# EAGLE board MainModule (EAGLE 9.6.2)
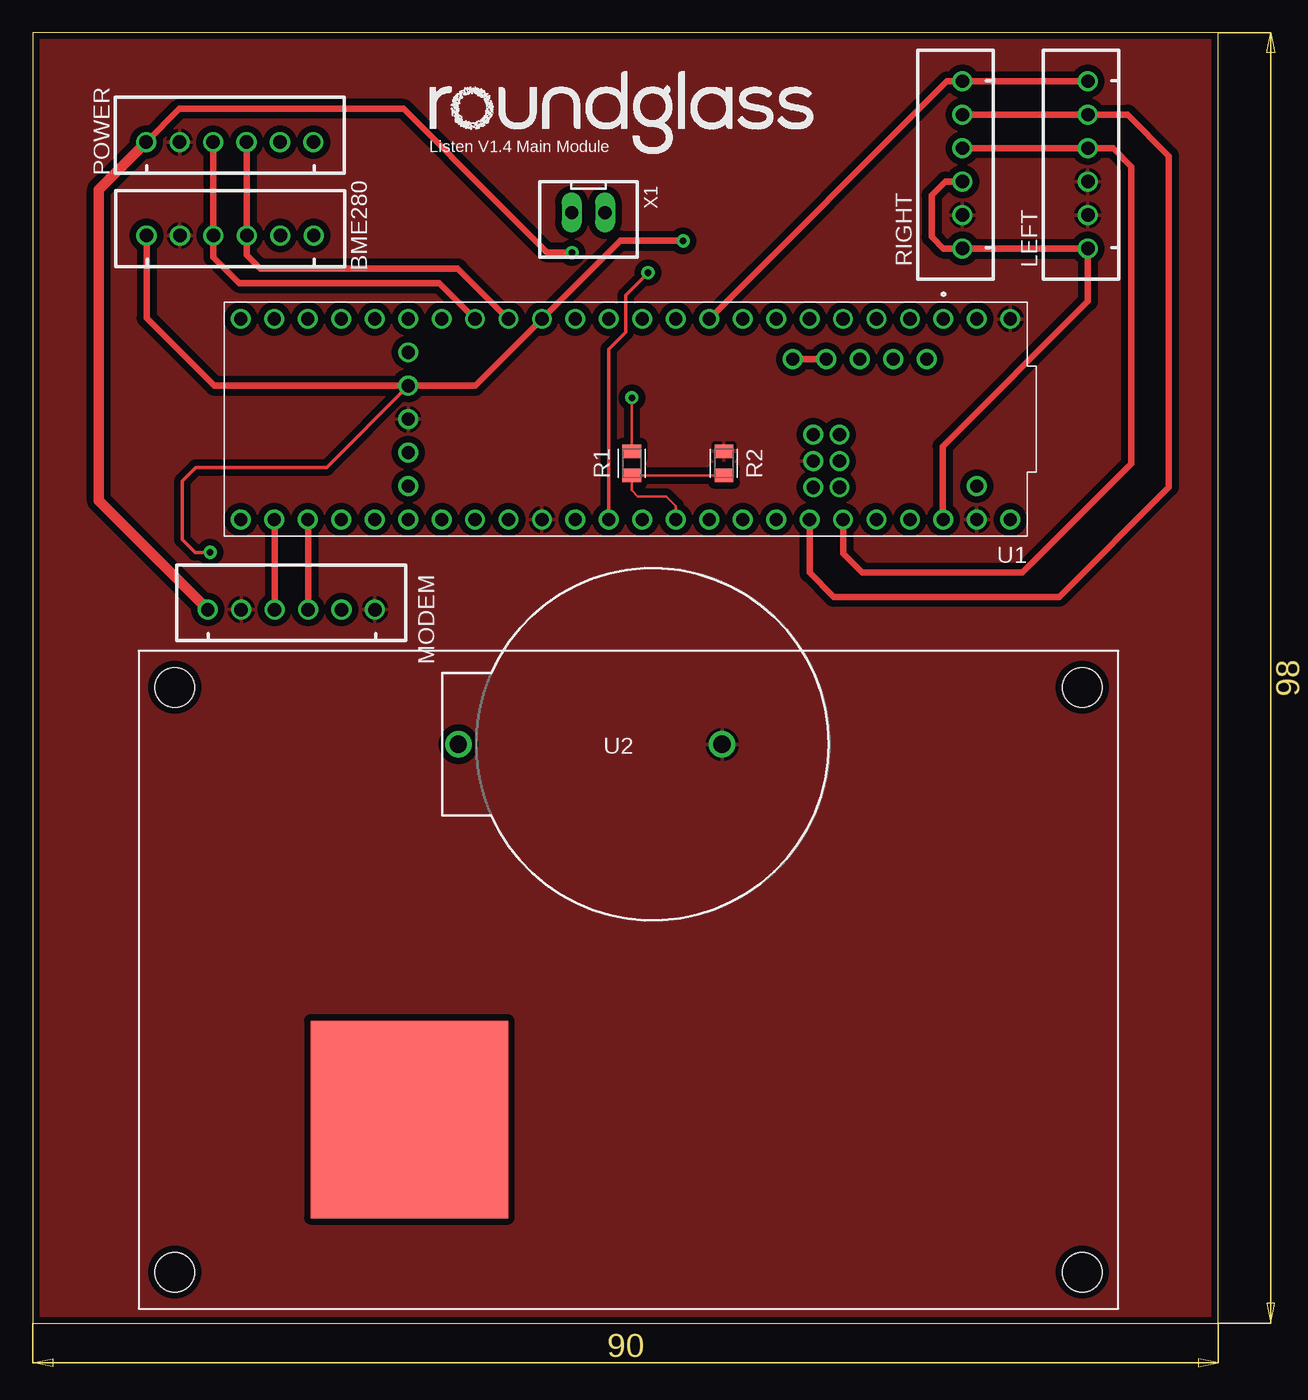
[diagram p0: board, top side]
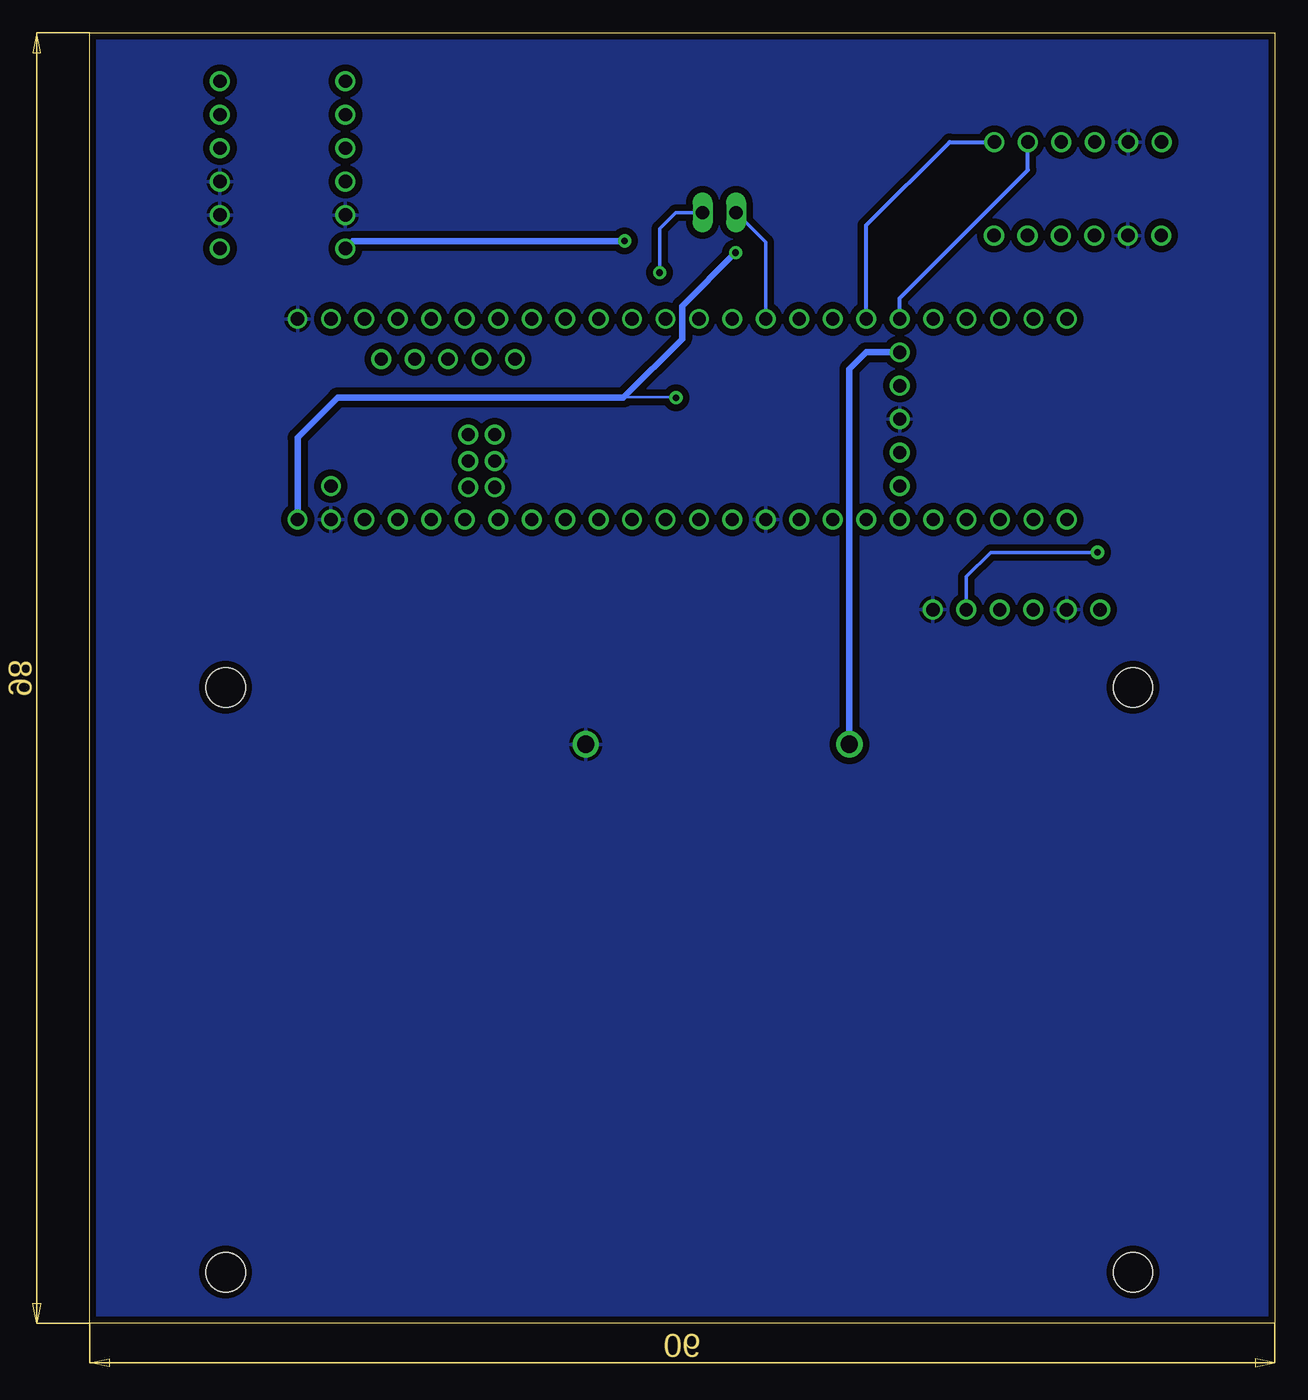
[diagram p1: board, bottom side, seen from below]

Size 90 x 98 mm. Coordinates in mm from the lower left corner, seen from the top.
Outline: 0,0 90,0 90,98 0,98 0,0
Copper layers (1*16): Top 0.035mm / dielectric 1.5mm / Bottom 0.035mm
Design rules "jotElectronics *": minimum track width 6mil, minimum drill 0.5mm, track to track 0.5mm, track to pad 0.5mm, pad to pad 0.5mil, via to via 0.5mm, smd to smd 0.25mm, copper to edge 0.5mm, drill to drill 0.5mm, minimum pad ring 10mil, minimum via ring 10mil, stop-mask expansion 4mil, vias tented up to drill 0mil, thermal gap 10mil

## Footprints (pad centres in the part's own frame; a part is rotated, then mirrored left to right if it is on the bottom)
JST-XH-06-PACKAGE-ROUND-PAD = drill 1.016: 1 -6.35,0; 2 -3.81,0; 3 -1.27,0; 4 1.27,0; 5 3.81,0; 6 6.35,0
RESC2012X65 = smd 1.031 x 1.42: 1 -0.919,0; 2 0.919,0
MODULE_DEV-16771 = drill 1: 0 -26.67,-7.62; 1 -24.13,-7.62; 2 -21.59,-7.62; 3 -19.05,-7.62; 3.3V_1 6.35,-7.62; 3.3V_2 -24.13,7.62; 3.3V_3 16.51,-2.54; 4 -16.51,-7.62; 5 -13.97,-7.62; 5V -22.86,-4.57; 6 -11.43,-7.62; 7 -8.89,-7.62; 8 -6.35,-7.62; 9 -3.81,-7.62; 10 -1.27,-7.62; 11 1.27,-7.62; 12 3.81,-7.62; 13 3.81,7.62; 14 1.27,7.62; 15 -1.27,7.62; 16 -3.81,7.62; 17 -6.35,7.62; 18 -8.89,7.62; 19 -11.43,7.62; 20 -13.97,7.62; 21 -16.51,7.62; 22 -19.05,7.62; 23 -21.59,7.62; 24 8.89,-7.62; 25 11.43,-7.62; 26 13.97,-7.62; 27 16.51,-7.62; 28 19.05,-7.62; 29 21.59,-7.62; 30 24.13,-7.62; 31 26.67,-7.62; 32 29.21,-7.62; 33 29.21,7.62; 34 26.67,7.62; 35 24.13,7.62; 36 21.59,7.62; 37 19.05,7.62; 38 16.51,7.62; 39 13.97,7.62; 40 11.43,7.62; 41 8.89,7.62; D+ -17.78,-4.57; D- -20.32,-4.57; GND1 -29.21,-7.62; GND2 6.35,7.62; GND3 -26.67,7.62; GND4 16.51,0; GND5 -14.24,3.17; LED -16.24,3.17; ON/OFF 16.51,5.08; PROGRAM 16.51,2.54; R+ -16.24,5.17; R- -14.24,5.17; T+ -14.24,1.17; T- -16.24,1.17; USB_GND1 -15.24,-4.57; USB_GND2 -12.7,-4.57; VBAT 16.51,-5.08; VIN -29.21,7.62; VUSB -26.67,5.08
1053 = drill 1.3 pad 2: 1 -5.265,0; 2 14.755,0
4GMODULE = hole 3: 2.74,2.77; 71.64,2.77; 71.64,47.19; 2.74,47.19
GPSANTENA = smd 15 x 15: P$1 7.59,7.47
JST-XH-02-PACKAGE-LONG-PAD = drill 1.016 long: 1 -1.27,0; 2 1.27,0

## Placement (x,y rotation side)
BME280  [JST-XH-06-PACKAGE-ROUND-PAD]  14.97,82.61 0 top
LEFT  [JST-XH-06-PACKAGE-ROUND-PAD]  80.1,87.98 90 top
MODEM  [JST-XH-06-PACKAGE-ROUND-PAD]  19.62,54.2 0 top
POWER  [JST-XH-06-PACKAGE-ROUND-PAD]  14.95,89.71 0 top
R1  22k  [RESC2012X65]  45.47,65.3 90 top
R2  22k  [RESC2012X65]  52.47,65.3 270 top
RIGHT  [JST-XH-06-PACKAGE-ROUND-PAD]  70.57,87.98 90 top
U1  DEV-16771  [MODULE_DEV-16771]  45,68.66 180 top
U2  1053  [1053]  47.06,43.97 180 top
U$1  4GMODULE4GMODULE  [4GMODULE]  8.03,1.1 0 top
U$2  GPSANTENA  [GPSANTENA]  21,8 0 top
X1  SOIL  [JST-XH-02-PACKAGE-LONG-PAD]  42.18,84.35 180 top

## Library data of the parts
BME280 LEFT MODEM POWER RIGHT = pinhead
R1 R2 = Resistor; CATEGORY: Resistor; SUB-CATEGORY: Fixed
U1 = DEV-16771; AVAILABILITY: In Stock; DESCRIPTION: RT1062 Teensy 4.1 series ARM® Cortex®-M7 MPU Embedded Evaluation Board; MF: SparkFun Electronics; MP: DEV-16771; PACKAGE: None; PRICE: None; PURCHASE-URL: https://pricing.snapeda.com/search/part/DEV-16771/?ref=eda; SPICEPREFIX: X
U2 = SamacSys_Parts; DESCRIPTION: Coin Cell Battery Holders BATTERY HOLDER FOR CR2450; HEIGHT: mm; MANUFACTURER_NAME: Keystone Electronics; MANUFACTURER_PART_NUMBER: 1053; MOUSER_PART_NUMBER: 534-1053-BH; MOUSER_PRICE-STOCK: https://www.mouser.co.uk/ProductDetail/Keystone-Electronics/1053?qs=%2F7TOpeL5Mz4zfgvqwo9sng%3D%3D
U$1 = 4Gmodule
U$2 = GPS_Antena
X1 = Rembrandt Electronics - JST XH Connectors v1-0

## Nets
3.3V: BME280.1 LEFT.1 MODEM.5 RIGHT.1 RIGHT.3 U1.3.3V_1 U1.3.3V_2 U1.3.3V_3 X1.2
5V: U1.5V
CONFIG: POWER.5 U1.27
GND: BME280.2 LEFT.2 LEFT.3 MODEM.2 MODEM.6 POWER.2 R2.1 RIGHT.2 U1.GND1 U1.GND2 U1.GND3 U1.GND4 U1.GND5 U2.1
N$2: R1.1 R2.2 U1.16
ON/OFF: U1.33
PKEY: U1.36
RECORDING: POWER.6 U1.26
RX: MODEM.3 U1.34
SCK: LEFT.4 RIGHT.4 U1.21
SCL: BME280.4 POWER.4 U1.24
SD: LEFT.6 RIGHT.6 U1.8
SDA: BME280.3 POWER.3 U1.25
SOIL: U1.14 X1.1
STS: U1.37
TX: MODEM.4 U1.35
USB_GND: U1.USB_GND1 U1.USB_GND2
VBAT: U1.VBAT U2.2
VIN: MODEM.1 POWER.1 R1.2 U1.VIN
WS: LEFT.5 RIGHT.5 U1.20

## Tracks (layer width: path | path; a pad name or v marks a point on that pad's centre or on a via)
3.3V  (via drill 0.5)
  Top 0.254: U1.3.3V_3 22.29,65 12.38,65 11.35,63.97 11.35,59.53 12.34,58.54 v13.46,58.54
  Top 0.5: BME280.1 8.62,76.34 13.77,71.2 | 33.57,71.2 U1.3.3V_1 | U1.3.3V_2 69.07,61.1 69.07,66.59 80.1,77.62 LEFT.1 RIGHT.1 69.12,81.63 68.24,82.51 68.24,85.66 69.28,86.71 RIGHT.3 | 49.35,82.22 v49.37,82.2
  Top 0.508: U1.3.3V_1 44.6,82.22 49.35,82.22 | 13.77,71.2 U1.3.3V_3 33.57,71.2
  Bottom 0.254: U1.3.3V_1 38.65,82.09 X1.2 | v13.46,58.54 21.58,58.54 23.43,56.69 MODEM.5
  Bottom 0.5: v49.37,82.2 70,82.2 RIGHT.1
CONFIG
  Bottom 0.305: U1.27 28.49,77.85 18.76,87.58 POWER.5
GND
  pour Top (isolate 0.305): 0,0 90,0 90,98 0,98
  pour Bottom: 0,0 90,0 90,98 0,98
N$2
  Top 0.203: U1.16 48.81,62.07 48.08,62.8 45.93,62.8 45.47,63.26 45.47,64.3 | 45.47,64.3 R1.1 R2.2 45.55,64.38 45.47,64.3
RECORDING
  Bottom 0.305: U1.26 31.03,83.38 24.7,89.71 POWER.6
RX
  Top 0.5: U1.34 18.35,61.02 MODEM.3
SCK
  Top 0.5: U1.21 61.51,58.45 62.96,57 75.12,57 83.41,65.29 83.41,87.86 82.02,89.25 LEFT.4 RIGHT.4
SCL
  Top 0.5: POWER.4 16.22,82.64 BME280.4 16.25,81.12 17.27,80.1 32.27,80.1 36.09,76.28 U1.24
SD
  Top 0.5: LEFT.6 RIGHT.6 69.4,94.33 U1.8
SDA
  Top 0.5: POWER.3 13.68,82.64 BME280.3 13.71,80.97 15.67,79 30.85,79 U1.25
SOIL  (via drill 0.5)
  Top 0.254: U1.14 43.73,74 45,75.27 45,78.08 v46.71,79.79
  Bottom 0.254: v46.71,79.79 46.71,83.15 45.51,84.35 X1.1
TX
  Top 0.5: U1.35 20.89,61.02 MODEM.4
USB_GND
  Top 0.5: U1.USB_GND2 U1.USB_GND1
VBAT
  Bottom 0.5: U2.2 32.3,72.47 31.03,73.74 U1.VBAT
VIN  (via drill 0.5)  (1 unrouted)
  Top 0.203: v45.48,70.3 v45.47,70.29 R1.2
  Top 0.5: v40.94,81.31 v40.93,81.32 39.05,81.32 35.27,85.1
  Top 0.508: POWER.1 11.12,92.23 28.14,92.23 35.27,85.1
  Top 0.813: POWER.1 5,86.11 5,62.47 MODEM.1
  Bottom 0.203: 49.44,70.33 45.52,70.33 v45.48,70.3
  Bottom 0.5: v40.94,81.31 40.96,81.31 45.01,77.26 45.01,74.76 49.44,70.33 49.47,70.3 71.17,70.3 74.21,67.26 U1.VIN
WS
  Top 0.5: RIGHT.5 LEFT.5 83.12,91.79 86.26,88.65 86.26,63.52 77.91,55.17 60.8,55.17 58.97,57 U1.20

## Text on the board
tNames: Listen V1.4 Main Module